# EAGLE board CAP1203-Panel (EAGLE 9.3.0)
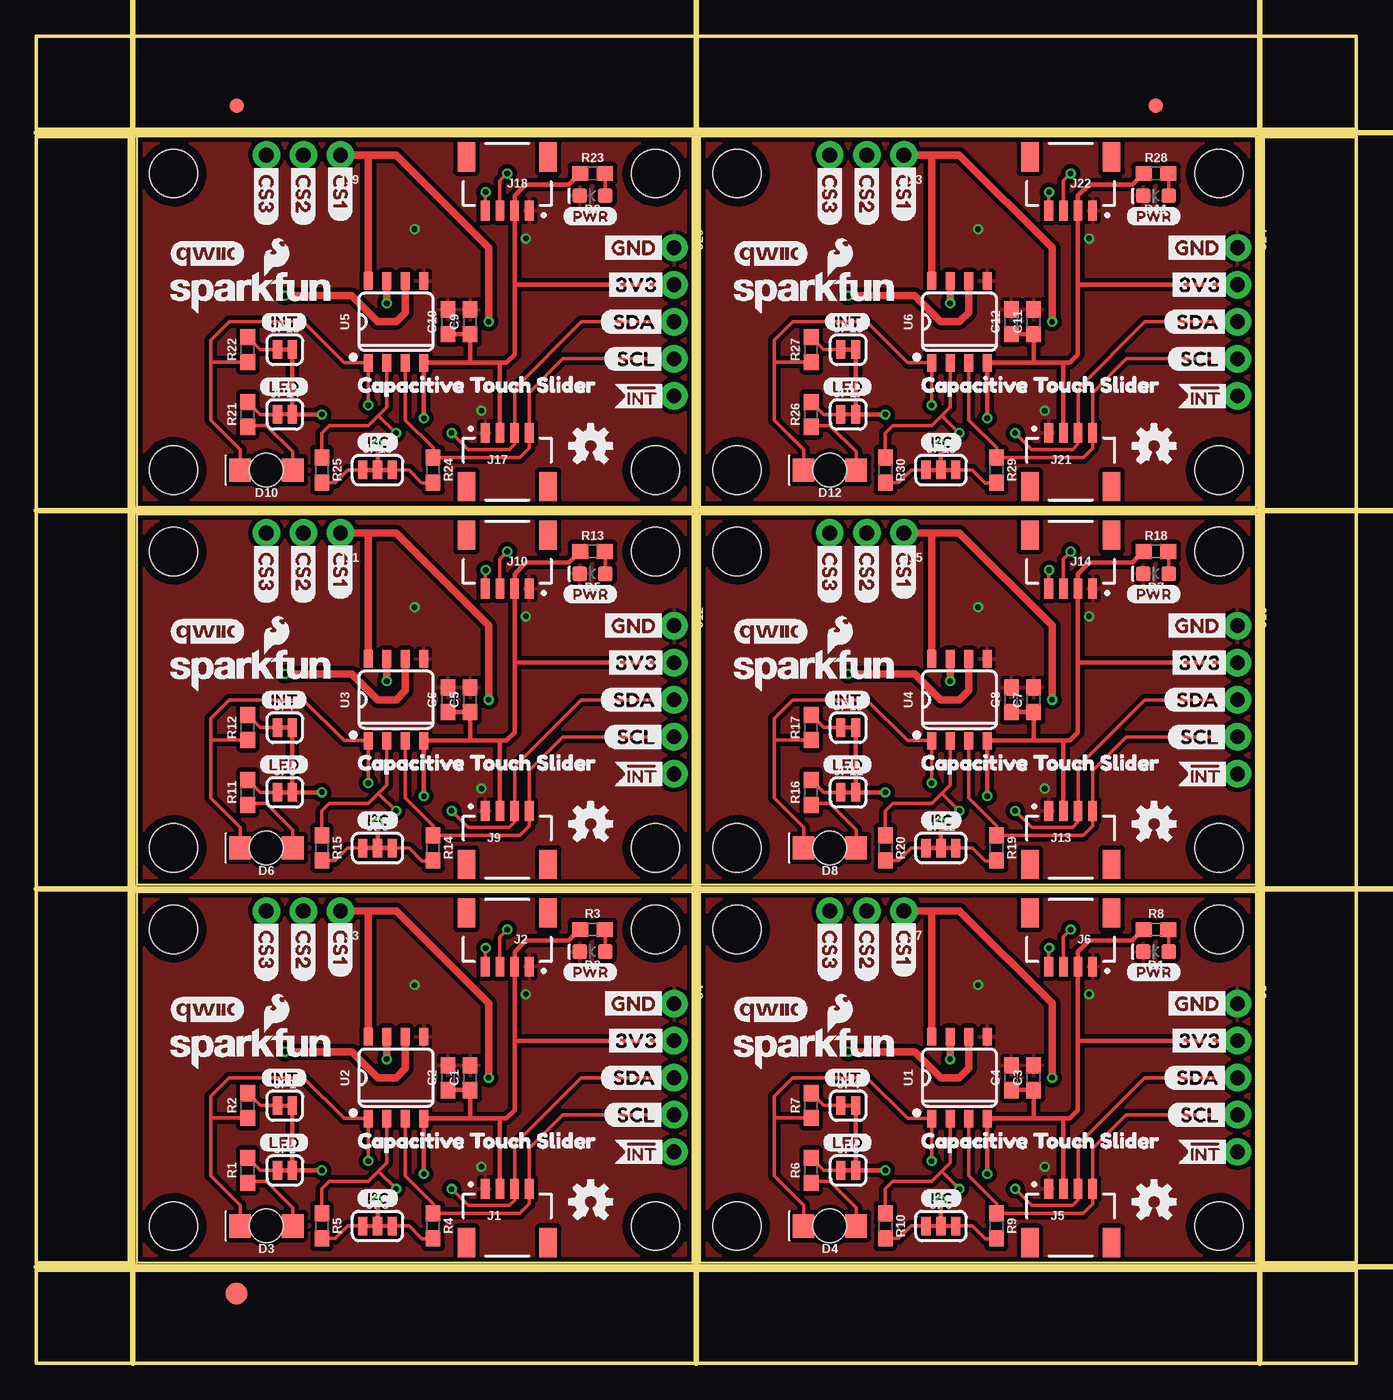
[diagram p0: board, top side]
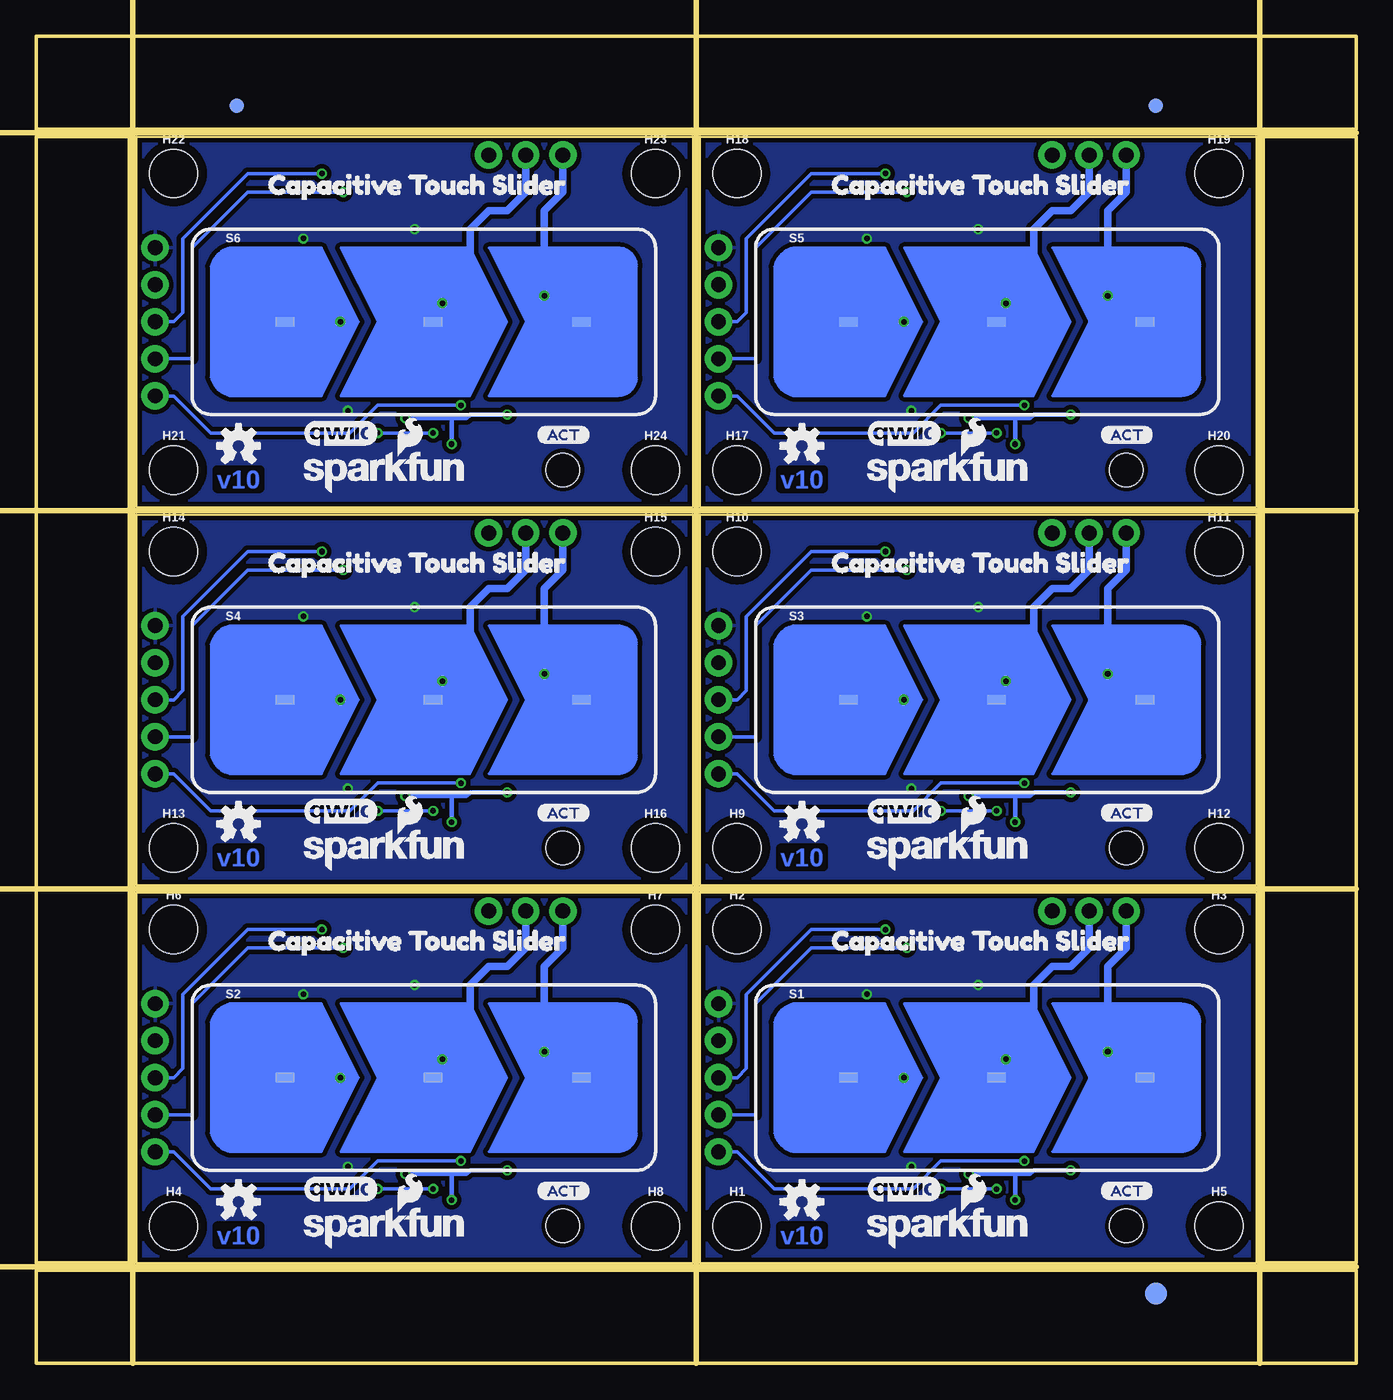
[diagram p1: board, bottom side, seen from below]

Size 90.42 x 90.93 mm. Coordinates in mm from the lower left corner, seen from the top.
Outline: 44.96,6.86 44.96,32.26 6.86,32.26 6.86,6.86 44.96,6.86
Outline: 83.57,6.86 83.57,32.26 45.47,32.26 45.47,6.86 83.57,6.86
Outline: 44.96,32.77 44.96,58.17 6.86,58.17 6.86,32.77 44.96,32.77
Outline: 83.57,32.77 83.57,58.17 45.47,58.17 45.47,32.77 83.57,32.77
Outline: 44.96,58.67 44.96,84.07 6.86,84.07 6.86,58.67 44.96,58.67
Outline: 83.57,58.67 83.57,84.07 45.47,84.07 45.47,58.67 83.57,58.67
Outline: 0,6.35 90.42,6.35 90.42,0 0,0 0,6.35
Outline: 84.07,84.07 90.42,84.07 90.42,6.86 84.07,6.86 84.07,84.07
Outline: 0,90.93 90.42,90.93 90.42,84.58 0,84.58 0,90.93
Outline: 0,84.07 6.35,84.07 6.35,6.86 0,6.86 0,84.07
Copper layers (1*16): Top 0.035mm / dielectric 1.5mm / Bottom 0.035mm
Design rules "SparkFun-2-layer-PCBWay-LIMIT": minimum track width 6mil, minimum drill 0.3mm, track to track 6mil, track to pad 6mil, pad to pad 6mil, via to via 6mil, smd to smd 6mil, copper to edge 6mil, drill to drill 6mil, minimum pad ring 6mil, minimum via ring 6mil, stop-mask expansion 4mil, vias tented up to drill 25mil, thermal gap 10mil
Net classes: 1 VCC: width 0.305 mm
Milling: 7 lines

## Footprints (pad centres in the part's own frame; a part is rotated, then mirrored left to right if it is on the bottom)
0603 = smd 1.1 x 1: 1 -0.85,0; 2 0.85,0
LED-0603 = smd 1 x 1: A -0.877,0; C 0.877,0
LED-1206-BOTTOM = smd 1.5 x 1.6: A -1.8,0; C 1.8,0 | hole 2.3: 0,0
FIDUCIAL-1X2 = smd 1 x 1: 1 0,0
FIDUCIAL-1.5X3 = smd 1.5 x 1.5: 1 0,0
STAND-OFF = hole 3.302: 0,0
JST04_1MM_RA = smd 0.6 x 1.35: 1 -1.5,0; 2 -0.5,0; 3 0.5,0; 4 1.5,0 | smd 1.2 x 2: NC1 2.8,-3.675; NC2 -2.8,-3.675
1X03_NO_SILK = drill 1.016 pad 1.88: 1 0,0; 2 2.54,0; 3 5.08,0
1X05_NO_SILK = drill 1.016 pad 1.88: 1 0,0; 2 2.54,0; 3 5.08,0; 4 7.62,0; 5 10.16,0
SMT-JUMPER_2_NC_TRACE_SILK = smd 0.635 x 1.27: 1 -0.508,0; 2 0.508,0
SMT-JUMPER_3_2-NC_TRACE_SILK = smd 0.635 x 1.27: 1 -1.016,0; 2 0,0; 3 1.016,0
CAP_SENSE_SLIDER = smd 1.27 x 0.635: 1 -10.16,0; 2 0,0; 3 10.16,0
SO08-TIGHT = smd 0.6 x 1.2: 1 -1.905,-2.8; 2 -0.635,-2.8; 3 0.635,-2.8; 4 1.905,-2.8; 5 1.905,2.8; 6 0.635,2.8; 7 -0.635,2.8; 8 -1.905,2.8

## Placement (x,y rotation side)
C1  0.1uF  [0603]  29.72,19.56 90 top
C2  1.0uF  [0603]  28.19,19.56 90 top
C3  0.1uF  [0603]  68.33,19.56 90 top
C4  1.0uF  [0603]  66.8,19.56 90 top
C5  0.1uF  [0603]  29.72,45.47 90 top
C6  1.0uF  [0603]  28.19,45.47 90 top
C7  0.1uF  [0603]  68.33,45.47 90 top
C8  1.0uF  [0603]  66.8,45.47 90 top
C9  0.1uF  [0603]  29.72,71.37 90 top
C10  1.0uF  [0603]  28.19,71.37 90 top
C11  0.1uF  [0603]  68.33,71.37 90 top
C12  1.0uF  [0603]  66.8,71.37 90 top
D1  RED  [LED-0603]  76.71,28.19 180 top
D2  RED  [LED-0603]  38.1,28.19 180 top
D3  Green  [LED-1206-BOTTOM]  15.75,9.4 180 top
D4  Green  [LED-1206-BOTTOM]  54.36,9.4 180 top
D5  RED  [LED-0603]  38.1,54.1 180 top
D6  Green  [LED-1206-BOTTOM]  15.75,35.31 180 top
D7  RED  [LED-0603]  76.71,54.1 180 top
D8  Green  [LED-1206-BOTTOM]  54.36,35.31 180 top
D9  RED  [LED-0603]  38.1,80.01 180 top
D10  Green  [LED-1206-BOTTOM]  15.75,61.21 180 top
D11  RED  [LED-0603]  76.71,80.01 180 top
D12  Green  [LED-1206-BOTTOM]  54.36,61.21 180 top
E$1  [FIDUCIAL-1X2]  13.72,86.17 0 top
E$2  [FIDUCIAL-1X2]  13.72,86.17 0 bottom
E$3  [FIDUCIAL-1X2]  76.71,86.17 0 top
E$4  [FIDUCIAL-1X2]  76.71,86.17 0 bottom
E$5  [FIDUCIAL-1.5X3]  13.72,4.76 0 top
E$6  [FIDUCIAL-1.5X3]  13.72,4.76 0 bottom
H1  STAND-OFF  [STAND-OFF]  42.42,9.4 0 bottom
H2  STAND-OFF  [STAND-OFF]  42.42,29.72 0 bottom
H3  STAND-OFF  [STAND-OFF]  9.4,29.72 0 bottom
H4  STAND-OFF  [STAND-OFF]  81.03,9.4 0 bottom
H5  STAND-OFF  [STAND-OFF]  9.4,9.4 0 bottom
H6  STAND-OFF  [STAND-OFF]  81.03,29.72 0 bottom
H7  STAND-OFF  [STAND-OFF]  48.01,29.72 0 bottom
H8  STAND-OFF  [STAND-OFF]  48.01,9.4 0 bottom
H9  STAND-OFF  [STAND-OFF]  42.42,35.31 0 bottom
H10  STAND-OFF  [STAND-OFF]  42.42,55.63 0 bottom
H11  STAND-OFF  [STAND-OFF]  9.4,55.63 0 bottom
H12  STAND-OFF  [STAND-OFF]  9.4,35.31 0 bottom
H13  STAND-OFF  [STAND-OFF]  81.03,35.31 0 bottom
H14  STAND-OFF  [STAND-OFF]  81.03,55.63 0 bottom
H15  STAND-OFF  [STAND-OFF]  48.01,55.63 0 bottom
H16  STAND-OFF  [STAND-OFF]  48.01,35.31 0 bottom
H17  STAND-OFF  [STAND-OFF]  42.42,61.21 0 bottom
H18  STAND-OFF  [STAND-OFF]  42.42,81.53 0 bottom
H19  STAND-OFF  [STAND-OFF]  9.4,81.53 0 bottom
H20  STAND-OFF  [STAND-OFF]  9.4,61.21 0 bottom
H21  STAND-OFF  [STAND-OFF]  81.03,61.21 0 bottom
H22  STAND-OFF  [STAND-OFF]  81.03,81.53 0 bottom
H23  STAND-OFF  [STAND-OFF]  48.01,81.53 0 bottom
H24  STAND-OFF  [STAND-OFF]  48.01,61.21 0 bottom
J1  Qwiic Right Angle  [JST04_1MM_RA]  32.26,11.94 0 top
J2  Qwiic Right Angle  [JST04_1MM_RA]  32.26,27.18 180 top
J3  Cap Touch Breakout Pins  [1X03_NO_SILK]  20.83,30.99 180 top
J4  I2C Breakout Pins  [1X05_NO_SILK]  43.69,24.64 270 top
J5  Qwiic Right Angle  [JST04_1MM_RA]  70.87,11.94 0 top
J6  Qwiic Right Angle  [JST04_1MM_RA]  70.87,27.18 180 top
J7  Cap Touch Breakout Pins  [1X03_NO_SILK]  59.44,30.99 180 top
J8  I2C Breakout Pins  [1X05_NO_SILK]  82.3,24.64 270 top
J9  Qwiic Right Angle  [JST04_1MM_RA]  32.26,37.85 0 top
J10  Qwiic Right Angle  [JST04_1MM_RA]  32.26,53.09 180 top
J11  Cap Touch Breakout Pins  [1X03_NO_SILK]  20.83,56.9 180 top
J12  I2C Breakout Pins  [1X05_NO_SILK]  43.69,50.55 270 top
J13  Qwiic Right Angle  [JST04_1MM_RA]  70.87,37.85 0 top
J14  Qwiic Right Angle  [JST04_1MM_RA]  70.87,53.09 180 top
J15  Cap Touch Breakout Pins  [1X03_NO_SILK]  59.44,56.9 180 top
J16  I2C Breakout Pins  [1X05_NO_SILK]  82.3,50.55 270 top
J17  Qwiic Right Angle  [JST04_1MM_RA]  32.26,63.75 0 top
J18  Qwiic Right Angle  [JST04_1MM_RA]  32.26,78.99 180 top
J19  Cap Touch Breakout Pins  [1X03_NO_SILK]  20.83,82.8 180 top
J20  I2C Breakout Pins  [1X05_NO_SILK]  43.69,76.45 270 top
J21  Qwiic Right Angle  [JST04_1MM_RA]  70.87,63.75 0 top
J22  Qwiic Right Angle  [JST04_1MM_RA]  70.87,78.99 180 top
J23  Cap Touch Breakout Pins  [1X03_NO_SILK]  59.44,82.8 180 top
J24  I2C Breakout Pins  [1X05_NO_SILK]  82.3,76.45 270 top
JP1  JUMPER-SMT_2_NC_TRACE_SILK  [SMT-JUMPER_2_NC_TRACE_SILK]  17.02,17.65 0 top
JP2  JUMPER-SMT_2_NC_TRACE_SILK  [SMT-JUMPER_2_NC_TRACE_SILK]  17.02,13.21 0 top
JP3  JUMPER-SMT_3_2-NC_TRACE_SILK  [SMT-JUMPER_3_2-NC_TRACE_SILK]  23.37,9.4 0 top
JP4  JUMPER-SMT_2_NC_TRACE_SILK  [SMT-JUMPER_2_NC_TRACE_SILK]  55.63,17.65 0 top
JP5  JUMPER-SMT_2_NC_TRACE_SILK  [SMT-JUMPER_2_NC_TRACE_SILK]  55.63,13.21 0 top
JP6  JUMPER-SMT_3_2-NC_TRACE_SILK  [SMT-JUMPER_3_2-NC_TRACE_SILK]  61.98,9.4 0 top
JP7  JUMPER-SMT_2_NC_TRACE_SILK  [SMT-JUMPER_2_NC_TRACE_SILK]  17.02,43.56 0 top
JP8  JUMPER-SMT_2_NC_TRACE_SILK  [SMT-JUMPER_2_NC_TRACE_SILK]  17.02,39.12 0 top
JP9  JUMPER-SMT_3_2-NC_TRACE_SILK  [SMT-JUMPER_3_2-NC_TRACE_SILK]  23.37,35.31 0 top
JP10  JUMPER-SMT_2_NC_TRACE_SILK  [SMT-JUMPER_2_NC_TRACE_SILK]  55.63,43.56 0 top
JP11  JUMPER-SMT_2_NC_TRACE_SILK  [SMT-JUMPER_2_NC_TRACE_SILK]  55.63,39.12 0 top
JP12  JUMPER-SMT_3_2-NC_TRACE_SILK  [SMT-JUMPER_3_2-NC_TRACE_SILK]  61.98,35.31 0 top
JP13  JUMPER-SMT_2_NC_TRACE_SILK  [SMT-JUMPER_2_NC_TRACE_SILK]  17.02,69.47 0 top
JP14  JUMPER-SMT_2_NC_TRACE_SILK  [SMT-JUMPER_2_NC_TRACE_SILK]  17.02,65.02 0 top
JP15  JUMPER-SMT_3_2-NC_TRACE_SILK  [SMT-JUMPER_3_2-NC_TRACE_SILK]  23.37,61.21 0 top
JP16  JUMPER-SMT_2_NC_TRACE_SILK  [SMT-JUMPER_2_NC_TRACE_SILK]  55.63,69.47 0 top
JP17  JUMPER-SMT_2_NC_TRACE_SILK  [SMT-JUMPER_2_NC_TRACE_SILK]  55.63,65.02 0 top
JP18  JUMPER-SMT_3_2-NC_TRACE_SILK  [SMT-JUMPER_3_2-NC_TRACE_SILK]  61.98,61.21 0 top
LOGO1  SFE_LOGO_NAME_FLAME.1_INCH  [SFE_LOGO_NAME_FLAME_.1]  14.73,21.59 0 top
LOGO2  SFE_LOGO_NAME_FLAME.1_INCH  [SFE_LOGO_NAME_FLAME_.1]  27.94,9.27 0 bottom
LOGO3  OSHW-LOGOS  [OSHW-LOGO-S]  37.97,11.05 0 bottom
LOGO4  SFE_LOGO_NAME_FLAME.1_INCH  [SFE_LOGO_NAME_FLAME_.1]  53.34,21.59 0 top
LOGO5  OSHW-LOGOS  [OSHW-LOGO-S]  37.97,11.05 0 top
LOGO6  OSHW-LOGOS  [OSHW-LOGO-S]  76.58,11.05 0 bottom
LOGO7  OSHW-LOGOS  [OSHW-LOGO-S]  76.58,11.05 0 top
LOGO8  SFE_LOGO_NAME_FLAME.1_INCH  [SFE_LOGO_NAME_FLAME_.1]  66.55,9.27 0 bottom
LOGO9  SFE_LOGO_NAME_FLAME.1_INCH  [SFE_LOGO_NAME_FLAME_.1]  14.73,47.5 0 top
LOGO10  OSHW-LOGOS  [OSHW-LOGO-S]  37.97,36.96 0 bottom
LOGO11  OSHW-LOGOS  [OSHW-LOGO-S]  37.97,36.96 0 top
LOGO12  SFE_LOGO_NAME_FLAME.1_INCH  [SFE_LOGO_NAME_FLAME_.1]  27.94,35.18 0 bottom
LOGO13  SFE_LOGO_NAME_FLAME.1_INCH  [SFE_LOGO_NAME_FLAME_.1]  53.34,47.5 0 top
LOGO14  OSHW-LOGOS  [OSHW-LOGO-S]  76.58,36.96 0 bottom
LOGO15  OSHW-LOGOS  [OSHW-LOGO-S]  76.58,36.96 0 top
LOGO16  SFE_LOGO_NAME_FLAME.1_INCH  [SFE_LOGO_NAME_FLAME_.1]  66.55,35.18 0 bottom
LOGO17  SFE_LOGO_NAME_FLAME.1_INCH  [SFE_LOGO_NAME_FLAME_.1]  14.73,73.41 0 top
LOGO18  OSHW-LOGOS  [OSHW-LOGO-S]  37.97,62.86 0 bottom
LOGO19  OSHW-LOGOS  [OSHW-LOGO-S]  37.97,62.86 0 top
LOGO20  SFE_LOGO_NAME_FLAME.1_INCH  [SFE_LOGO_NAME_FLAME_.1]  27.94,61.09 0 bottom
LOGO21  SFE_LOGO_NAME_FLAME.1_INCH  [SFE_LOGO_NAME_FLAME_.1]  53.34,73.41 0 top
LOGO22  OSHW-LOGOS  [OSHW-LOGO-S]  76.58,62.86 0 bottom
LOGO23  OSHW-LOGOS  [OSHW-LOGO-S]  76.58,62.86 0 top
LOGO24  SFE_LOGO_NAME_FLAME.1_INCH  [SFE_LOGO_NAME_FLAME_.1]  66.55,61.09 0 bottom
R1  1k  [0603]  14.48,13.21 90 top
R2  10k  [0603]  14.48,17.65 90 top
R3  1k  [0603]  38.1,29.72 0 top
R4  2.2k  [0603]  27.18,9.4 270 top
R5  2.2k  [0603]  19.56,9.4 270 top
R6  1k  [0603]  53.09,13.21 90 top
R7  10k  [0603]  53.09,17.65 90 top
R8  1k  [0603]  76.71,29.72 0 top
R9  2.2k  [0603]  65.79,9.4 270 top
R10  2.2k  [0603]  58.17,9.4 270 top
R11  1k  [0603]  14.48,39.12 90 top
R12  10k  [0603]  14.48,43.56 90 top
R13  1k  [0603]  38.1,55.63 0 top
R14  2.2k  [0603]  27.18,35.31 270 top
R15  2.2k  [0603]  19.56,35.31 270 top
R16  1k  [0603]  53.09,39.12 90 top
R17  10k  [0603]  53.09,43.56 90 top
R18  1k  [0603]  76.71,55.63 0 top
R19  2.2k  [0603]  65.79,35.31 270 top
R20  2.2k  [0603]  58.17,35.31 270 top
R21  1k  [0603]  14.48,65.02 90 top
R22  10k  [0603]  14.48,69.47 90 top
R23  1k  [0603]  38.1,81.53 0 top
R24  2.2k  [0603]  27.18,61.21 270 top
R25  2.2k  [0603]  19.56,61.21 270 top
R26  1k  [0603]  53.09,65.02 90 top
R27  10k  [0603]  53.09,69.47 90 top
R28  1k  [0603]  76.71,81.53 0 top
R29  2.2k  [0603]  65.79,61.21 270 top
R30  2.2k  [0603]  58.17,61.21 270 top
S1  [CAP_SENSE_SLIDER]  24.64,19.56 0 bottom
S2  [CAP_SENSE_SLIDER]  63.25,19.56 0 bottom
S3  [CAP_SENSE_SLIDER]  24.64,45.47 0 bottom
S4  [CAP_SENSE_SLIDER]  63.25,45.47 0 bottom
S5  [CAP_SENSE_SLIDER]  24.64,71.37 0 bottom
S6  [CAP_SENSE_SLIDER]  63.25,71.37 0 bottom
U1  CAP1203  [SO08-TIGHT]  63.25,19.56 0 top
U2  CAP1203  [SO08-TIGHT]  24.64,19.56 0 top
U3  CAP1203  [SO08-TIGHT]  24.64,45.47 0 top
U4  CAP1203  [SO08-TIGHT]  63.25,45.47 0 top
U5  CAP1203  [SO08-TIGHT]  24.64,71.37 0 top
U6  CAP1203  [SO08-TIGHT]  63.25,71.37 0 top
U$1  [3V3-04]  38.73,22.1 0 top
U$2  [GND-04]  38.48,24.64 0 top
U$3  [3V3-04]  77.34,22.1 0 top
U$4  QWIIC_LOGO_5MM  [QWIIC_5MM]  30.99,11.94 0 bottom
U$5  [GND-04]  77.09,24.64 0 top
U$6  [ACT0]  17.53,11.81 0 bottom
U$7  [#INT5]  39.37,14.48 0 top
U$8  [SCL3]  38.86,17.02 0 top
U$9  [SDA4]  38.61,19.56 0 top
U$10  [CS10]  20.83,30.61 270 top
U$11  [CS21]  18.29,30.61 270 top
U$12  [CS32]  15.75,30.61 270 top
U$13  [I_SUPER2_C-()-03]  21.97,11.3 0 top
U$14  [INT0]  15.37,19.56 0 top
U$15  [PWR-()-03]  36.07,26.8 0 top
U$16  [LED0]  15.24,15.11 0 top
U$17  QWIIC_LOGO_5MM  [QWIIC_5MM]  11.68,24.26 0 top
U$18  [CAPACITIVE_TOUCH_SLIDER0]  37.08,28.96 0 bottom
U$19  [CAPACITIVE_TOUCH_SLIDER0]  21.08,15.24 0 top
U$20  [#INT5]  77.98,14.48 0 top
U$21  [SCL3]  77.47,17.02 0 top
U$22  [SDA4]  77.22,19.56 0 top
U$23  [CS10]  59.44,30.61 270 top
U$24  [CS21]  56.9,30.61 270 top
U$25  [CS32]  54.36,30.61 270 top
U$26  [LED0]  53.85,15.11 0 top
U$27  [I_SUPER2_C-()-03]  60.58,11.3 0 top
U$28  [INT0]  53.97,19.56 0 top
U$29  [PWR-()-03]  74.68,26.8 0 top
U$30  QWIIC_LOGO_5MM  [QWIIC_5MM]  50.29,24.26 0 top
U$31  QWIIC_LOGO_5MM  [QWIIC_5MM]  69.6,11.94 0 bottom
U$32  [ACT0]  56.13,11.81 0 bottom
U$33  [CAPACITIVE_TOUCH_SLIDER0]  75.69,28.96 0 bottom
U$34  [CAPACITIVE_TOUCH_SLIDER0]  59.69,15.24 0 top
U$35  [3V3-04]  38.73,48.01 0 top
U$36  [GND-04]  38.48,50.55 0 top
U$37  [#INT5]  39.37,40.39 0 top
U$38  [SCL3]  38.86,42.93 0 top
U$39  [SDA4]  38.61,45.47 0 top
U$40  [CS10]  20.83,56.51 270 top
U$41  [CS21]  18.29,56.51 270 top
U$42  [CS32]  15.75,56.51 270 top
U$43  [LED0]  15.24,41.02 0 top
U$44  [I_SUPER2_C-()-03]  21.97,37.21 0 top
U$45  [INT0]  15.37,45.47 0 top
U$46  [PWR-()-03]  36.07,52.7 0 top
U$47  QWIIC_LOGO_5MM  [QWIIC_5MM]  11.68,50.16 0 top
U$48  QWIIC_LOGO_5MM  [QWIIC_5MM]  30.99,37.85 0 bottom
U$49  [ACT0]  17.53,37.72 0 bottom
U$50  [CAPACITIVE_TOUCH_SLIDER0]  37.08,54.86 0 bottom
U$51  [CAPACITIVE_TOUCH_SLIDER0]  21.08,41.15 0 top
U$52  [3V3-04]  77.34,48.01 0 top
U$53  [GND-04]  77.09,50.55 0 top
U$54  [#INT5]  77.98,40.39 0 top
U$55  [SCL3]  77.47,42.93 0 top
U$56  [SDA4]  77.22,45.47 0 top
U$57  [CS10]  59.44,56.51 270 top
U$58  [CS21]  56.9,56.51 270 top
U$59  [CS32]  54.36,56.51 270 top
U$60  [LED0]  53.85,41.02 0 top
U$61  [I_SUPER2_C-()-03]  60.58,37.21 0 top
U$62  [INT0]  53.97,45.47 0 top
U$63  [PWR-()-03]  74.68,52.7 0 top
U$64  QWIIC_LOGO_5MM  [QWIIC_5MM]  50.29,50.16 0 top
U$65  QWIIC_LOGO_5MM  [QWIIC_5MM]  69.6,37.85 0 bottom
U$66  [ACT0]  56.13,37.72 0 bottom
U$67  [CAPACITIVE_TOUCH_SLIDER0]  75.69,54.86 0 bottom
U$68  [CAPACITIVE_TOUCH_SLIDER0]  59.69,41.15 0 top
U$69  [3V3-04]  38.73,73.91 0 top
U$70  [GND-04]  38.48,76.45 0 top
U$71  [#INT5]  39.37,66.29 0 top
U$72  [SCL3]  38.86,68.83 0 top
U$73  [SDA4]  38.61,71.37 0 top
U$74  [CS10]  20.83,82.42 270 top
U$75  [CS21]  18.29,82.42 270 top
U$76  [CS32]  15.75,82.42 270 top
U$77  [LED0]  15.24,66.93 0 top
U$78  [I_SUPER2_C-()-03]  21.97,63.12 0 top
U$79  [INT0]  15.37,71.37 0 top
U$80  [PWR-()-03]  36.07,78.61 0 top
U$81  QWIIC_LOGO_5MM  [QWIIC_5MM]  11.68,76.07 0 top
U$82  QWIIC_LOGO_5MM  [QWIIC_5MM]  30.99,63.75 0 bottom
U$83  [ACT0]  17.53,63.63 0 bottom
U$84  [CAPACITIVE_TOUCH_SLIDER0]  37.08,80.77 0 bottom
U$85  [CAPACITIVE_TOUCH_SLIDER0]  21.08,67.06 0 top
U$86  [3V3-04]  77.34,73.91 0 top
U$87  [GND-04]  77.09,76.45 0 top
U$88  [#INT5]  77.98,66.29 0 top
U$89  [SCL3]  77.47,68.83 0 top
U$90  [SDA4]  77.22,71.37 0 top
U$91  [CS10]  59.44,82.42 270 top
U$92  [CS21]  56.9,82.42 270 top
U$93  [CS32]  54.36,82.42 270 top
U$94  [LED0]  53.85,66.93 0 top
U$95  [I_SUPER2_C-()-03]  60.58,63.12 0 top
U$96  [INT0]  53.97,71.37 0 top
U$97  [PWR-()-03]  74.68,78.61 0 top
U$98  QWIIC_LOGO_5MM  [QWIIC_5MM]  50.29,76.07 0 top
U$99  QWIIC_LOGO_5MM  [QWIIC_5MM]  69.6,63.75 0 bottom
U$100  [ACT0]  56.13,63.63 0 bottom
U$101  [CAPACITIVE_TOUCH_SLIDER0]  75.69,80.77 0 bottom
U$102  [CAPACITIVE_TOUCH_SLIDER0]  59.69,67.06 0 top

## Library data of the parts
C1 C3 C5 C7 C9 C11 = SparkFun-Capacitors; PROD_ID: CAP-08604
C2 C4 C6 C8 C10 C12 = SparkFun-Capacitors; PROD_ID: CAP-00868
D1 D2 D5 D7 D9 D11 = SparkFun-LED; PROD_ID: DIO-00819
D3 D4 D6 D8 D10 D12 = SparkFun-LED; PROD_ID: DIO-11076
E$1-E$4 LOGO1-LOGO24 U$4 U$17 U$30 U$31 U$47 U$48 U$64 U$65 U$81 U$82 U$98 U$99 = SparkFun-Aesthetics
E$5 E$6 = SparkFun-Retired
H1-H24 = SparkFun-Hardware
J1 J2 J5 J6 J9 J10 J13 J14 J17 J18 J21 J22 = SparkFun-Connectors; PROD_ID: CONN-13694
J3 J4 J7 J8 J11 J12 J15 J16 J19 J20 J23 J24 = SparkFun-Connectors
JP1-JP18 = SparkFun-Jumpers
R1 R3 R6 R8 R11 R13 R16 R18 R21 R23 R26 R28 = SparkFun-Resistors; PROD_ID: RES-07856
R2 R7 R12 R17 R22 R27 = SparkFun-Resistors; PROD_ID: RES-00824
R4 R5 R9 R10 R14 R15 R19 R20 R24 R25 R29 R30 = SparkFun-Resistors; PROD_ID: RES-08272
S1-S6 = SparkX
U1-U6 = SparkFun-Sensors; PROD_ID: IC-14356
U$1-U$3 U$5 U$13 U$15 U$27 U$29 U$35 U$36 U$44 U$46 U$52 U$53 U$61 U$63 U$69 U$70 U$78 U$80 U$86 U$87 U$95 U$97 = Labels
U$6 U$32 U$49 U$66 U$83 U$100 = buzzard_labels (5)
U$7-U$12 U$20-U$25 U$37-U$42 U$54-U$59 U$71-U$76 U$88-U$93 = buzzard_labels-CAP1203
U$14 U$28 U$45 U$62 U$79 U$96 = buzzard_labels (4)
U$16 U$26 U$43 U$60 U$77 U$94 = buzzard_labels (1)
U$18 U$33 U$50 U$67 U$84 U$101 = buzzard_labels (10)
U$19 U$34 U$51 U$68 U$85 U$102 = buzzard_labels (12)

## Nets
3.3V [VCC]: C1.1 C2.1 J1.2 J2.2 J4.2 JP1.2 JP2.2 JP3.2 R3.1 U2.4
3.3V1 [VCC]: C3.1 C4.1 J5.2 J6.2 J8.2 JP4.2 JP5.2 JP6.2 R8.1 U1.4
3.3V2 [VCC]: C5.1 C6.1 J9.2 J10.2 J12.2 JP7.2 JP8.2 JP9.2 R13.1 U3.4
3.3V3 [VCC]: C7.1 C8.1 J13.2 J14.2 J16.2 JP10.2 JP11.2 JP12.2 R18.1 U4.4
3.3V4 [VCC]: C9.1 C10.1 J17.2 J18.2 J20.2 JP13.2 JP14.2 JP15.2 R23.1 U5.4
3.3V5 [VCC]: C11.1 C12.1 J21.2 J22.2 J24.2 JP16.2 JP17.2 JP18.2 R28.1 U6.4
!INT: D3.C J4.5 R2.1 U2.1
!INT1: D4.C J8.5 R7.1 U1.1
!INT2: D6.C J12.5 R12.1 U3.1
!INT3: D8.C J16.5 R17.1 U4.1
!INT4: D10.C J20.5 R22.1 U5.1
!INT5: D12.C J24.5 R27.1 U6.1
CS1: J3.1 S1.1 U2.8
CS2: J3.2 S1.2 U2.7
CS3: J3.3 S1.3 U2.6
CS4: J7.1 S2.1 U1.8
CS5: J7.2 S2.2 U1.7
CS6: J7.3 S2.3 U1.6
CS7: J11.1 S3.1 U3.8
CS8: J11.2 S3.2 U3.7
CS9: J11.3 S3.3 U3.6
CS10: J15.1 S4.1 U4.8
CS11: J15.2 S4.2 U4.7
CS12: J15.3 S4.3 U4.6
CS13: J19.1 S5.1 U5.8
CS14: J19.2 S5.2 U5.7
CS15: J19.3 S5.3 U5.6
CS16: J23.1 S6.1 U6.8
CS17: J23.2 S6.2 U6.7
CS18: J23.3 S6.3 U6.6
GND: C1.2 C2.2 D2.C J1.1 J2.1 J4.1 U2.5
GND1: C3.2 C4.2 D1.C J5.1 J6.1 J8.1 U1.5
GND2: C5.2 C6.2 D5.C J9.1 J10.1 J12.1 U3.5
GND3: C7.2 C8.2 D7.C J13.1 J14.1 J16.1 U4.5
GND4: C9.2 C10.2 D9.C J17.1 J18.1 J20.1 U5.5
GND5: C11.2 C12.2 D11.C J21.1 J22.1 J24.1 U6.5
N$1: JP1.1 R2.2
N$2: D2.A R3.2
N$3: JP2.1 R1.2
N$4: JP3.3 R4.2
N$5: JP3.1 R5.2
N$6: D3.A R1.1
N$7: JP4.1 R7.2
N$8: JP5.1 R6.2
N$9: D4.A R6.1
N$10: D1.A R8.2
N$11: JP6.3 R9.2
N$12: JP6.1 R10.2
N$13: JP7.1 R12.2
N$14: JP8.1 R11.2
N$15: D6.A R11.1
N$16: D5.A R13.2
N$17: JP9.3 R14.2
N$18: JP9.1 R15.2
N$19: JP10.1 R17.2
N$20: JP11.1 R16.2
N$21: D8.A R16.1
N$22: D7.A R18.2
N$23: JP12.3 R19.2
N$24: JP12.1 R20.2
N$25: JP13.1 R22.2
N$26: JP14.1 R21.2
N$27: D10.A R21.1
N$28: D9.A R23.2
N$29: JP15.3 R24.2
N$30: JP15.1 R25.2
N$31: JP16.1 R27.2
N$32: JP17.1 R26.2
N$33: D12.A R26.1
N$34: D11.A R28.2
N$35: JP18.3 R29.2
N$36: JP18.1 R30.2
SCL: J1.4 J2.4 J4.4 R4.1 U2.3
SCL1: J5.4 J6.4 J8.4 R9.1 U1.3
SCL2: J9.4 J10.4 J12.4 R14.1 U3.3
SCL3: J13.4 J14.4 J16.4 R19.1 U4.3
SCL4: J17.4 J18.4 J20.4 R24.1 U5.3
SCL5: J21.4 J22.4 J24.4 R29.1 U6.3
SDA: J1.3 J2.3 J4.3 R5.1 U2.2
SDA1: J5.3 J6.3 J8.3 R10.1 U1.2
SDA2: J9.3 J10.3 J12.3 R15.1 U3.2
SDA3: J13.3 J14.3 J16.3 R20.1 U4.2
SDA4: J17.3 J18.3 J20.3 R25.1 U5.2
SDA5: J21.3 J22.3 J24.3 R30.1 U6.2

## Tracks (layer width: path | path; a pad name or v marks a point on that pad's centre or on a via)
3.3V  (via drill 0.38)
  Top 0.305: JP1.2 JP2.2 v19.56,13.21 | v23.37,11.18 JP3.2 | v26.54,12.95 U2.4 29.71,16.76 | 32.76,22.1 J2.2 32.76,28.19 33.53,28.96 36.49,28.96 R3.1 | 32.76,22.1 32.76,17.32 32.2,16.76 31.75,16.76 | C2.1 C1.1 29.71,16.76 | 29.71,16.76 31.75,16.76 | 31.75,16.76 31.76,16.75 J1.2 | J4.2 32.76,22.1
  Bottom 0.305: v19.56,13.21 22.1,13.21 22.35,12.95 23.37,12.95 | v26.54,12.95 23.37,12.95 | 23.37,12.95 v23.37,11.18
3.3V1  (via drill 0.38)
  Top 0.305: JP4.2 JP5.2 v58.17,13.21 | v61.98,11.18 JP6.2 | v65.15,12.95 U1.4 68.32,16.76 | 71.37,22.1 J6.2 71.37,28.19 72.14,28.96 75.1,28.96 R8.1 | 71.37,22.1 71.37,17.32 70.81,16.76 70.36,16.76 | C4.1 C3.1 68.32,16.76 | 68.32,16.76 70.36,16.76 | 70.36,16.76 70.37,16.75 J5.2 | J8.2 71.37,22.1
  Bottom 0.305: v58.17,13.21 60.71,13.21 60.96,12.95 61.98,12.95 | v65.15,12.95 61.98,12.95 | 61.98,12.95 v61.98,11.18
3.3V2  (via drill 0.38)
  Top 0.305: JP7.2 JP8.2 v19.56,39.12 | v23.37,37.08 JP9.2 | v26.54,38.86 U3.4 29.71,42.67 | 32.76,48.01 J10.2 32.76,54.09 33.53,54.86 36.49,54.86 R13.1 | 32.76,48.01 32.76,43.23 32.2,42.67 31.75,42.67 | C6.1 C5.1 29.71,42.67 | 29.71,42.67 31.75,42.67 | 31.75,42.67 31.76,42.66 J9.2 | J12.2 32.76,48.01
  Bottom 0.305: v19.56,39.12 22.1,39.12 22.35,38.86 23.37,38.86 | v26.54,38.86 23.37,38.86 | 23.37,38.86 v23.37,37.08
3.3V3  (via drill 0.38)
  Top 0.305: JP10.2 JP11.2 v58.17,39.12 | v61.98,37.08 JP12.2 | v65.15,38.86 U4.4 68.32,42.67 | 71.37,48.01 J14.2 71.37,54.09 72.14,54.86 75.1,54.86 R18.1 | 71.37,48.01 71.37,43.23 70.81,42.67 70.36,42.67 | C8.1 C7.1 68.32,42.67 | 68.32,42.67 70.36,42.67 | 70.36,42.67 70.37,42.66 J13.2 | J16.2 71.37,48.01
  Bottom 0.305: v58.17,39.12 60.71,39.12 60.96,38.86 61.98,38.86 | v65.15,38.86 61.98,38.86 | 61.98,38.86 v61.98,37.08
3.3V4  (via drill 0.38)
  Top 0.305: JP13.2 JP14.2 v19.56,65.02 | v23.37,62.99 JP15.2 | v26.54,64.77 U5.4 29.71,68.57 | 32.76,73.91 J18.2 32.76,80 33.53,80.77 36.49,80.77 R23.1 | 32.76,73.91 32.76,69.13 32.2,68.57 31.75,68.57 | C10.1 C9.1 29.71,68.57 | 29.71,68.57 31.75,68.57 | 31.75,68.57 31.76,68.57 J17.2 | J20.2 32.76,73.91
  Bottom 0.305: v19.56,65.02 22.1,65.02 22.35,64.77 23.37,64.77 | v26.54,64.77 23.37,64.77 | 23.37,64.77 v23.37,62.99
3.3V5  (via drill 0.38)
  Top 0.305: JP16.2 JP17.2 v58.17,65.02 | v61.98,62.99 JP18.2 | v65.15,64.77 U6.4 68.32,68.57 | 71.37,73.91 J22.2 71.37,80 72.14,80.77 75.1,80.77 R28.1 | 71.37,73.91 71.37,69.13 70.81,68.57 70.36,68.57 | C12.1 C11.1 68.32,68.57 | 68.32,68.57 70.36,68.57 | 70.36,68.57 70.37,68.57 J21.2 | J24.2 71.37,73.91
  Bottom 0.305: v58.17,65.02 60.71,65.02 60.96,64.77 61.98,64.77 | v65.15,64.77 61.98,64.77 | 61.98,64.77 v61.98,62.99
!INT  (via drill 0.38)
  Top 0.254: v22.73,13.84 U2.1 21.09,16.76 18.29,19.56 13.21,19.56 11.94,18.29 11.94,16.8 | D3.C 13.97,9.42 13.97,10.79 11.94,12.83 11.94,16.8 | R2.1 11.94,16.8
  Bottom 0.254: J4.5 42.42,14.48 39.88,11.94 30.35,11.94 28.45,13.84 v22.73,13.84
!INT1  (via drill 0.38)
  Top 0.254: v61.34,13.84 U1.1 59.7,16.76 56.9,19.56 51.82,19.56 50.55,18.29 50.55,16.8 | D4.C 52.58,9.42 52.58,10.79 50.55,12.83 50.55,16.8 | R7.1 50.55,16.8
  Bottom 0.254: J8.5 81.03,14.48 78.49,11.94 68.96,11.94 67.06,13.84 v61.34,13.84
!INT2  (via drill 0.38)
  Top 0.254: v22.73,39.75 U3.1 21.09,42.67 18.29,45.47 13.21,45.47 11.94,44.2 11.94,42.71 | D6.C 13.97,35.33 13.97,36.7 11.94,38.73 11.94,42.71 | R12.1 11.94,42.71
  Bottom 0.254: J12.5 42.42,40.39 39.88,37.85 30.35,37.85 28.45,39.75 v22.73,39.75
!INT3  (via drill 0.38)
  Top 0.254: v61.34,39.75 U4.1 59.7,42.67 56.9,45.47 51.82,45.47 50.55,44.2 50.55,42.71 | D8.C 52.58,35.33 52.58,36.7 50.55,38.73 50.55,42.71 | R17.1 50.55,42.71
  Bottom 0.254: J16.5 81.03,40.39 78.49,37.85 68.96,37.85 67.06,39.75 v61.34,39.75
!INT4  (via drill 0.38)
  Top 0.254: v22.73,65.66 U5.1 21.09,68.57 18.29,71.37 13.21,71.37 11.94,70.1 11.94,68.62 | D10.C 13.97,61.24 13.97,62.61 11.94,64.64 11.94,68.62 | R22.1 11.94,68.62
  Bottom 0.254: J20.5 42.42,66.29 39.88,63.75 30.35,63.75 28.45,65.66 v22.73,65.66
!INT5  (via drill 0.38)
  Top 0.254: v61.34,65.66 U6.1 59.7,68.57 56.9,71.37 51.82,71.37 50.55,70.1 50.55,68.62 | D12.C 52.58,61.24 52.58,62.61 50.55,64.64 50.55,68.62 | R27.1 50.55,68.62
  Bottom 0.254: J24.5 81.03,66.29 78.49,63.75 68.96,63.75 67.06,65.66 v61.34,65.66
CS1  (via drill 0.38)
  Top 0.508: v30.99,19.56 30.99,24.64 24.64,30.99 22.73,30.99 | U2.8 22.73,30.99 | 22.73,30.99 J3.1
  Bottom 0.508: S1.1 v30.99,19.56
CS2  (via drill 0.38)
  Top 0.508: U2.7 v24,20.83
  Bottom 0.254: 24,20.95 v24,20.83
  Bottom 0.508: S1.2 24,20.19 v24,20.83 22.1,22.73 22.1,25.91 20.83,27.18 19.56,27.18 18.29,28.45 J3.2
CS3  (via drill 0.38)
  Top 0.508: v17.02,21.34 21.59,21.34 23.37,19.56 24.64,19.56 25.27,20.19 U2.6
  Bottom 0.508: S1.3 16.26,21.34 v17.02,21.34 17.02,27.18 15.75,28.45 J3.3
CS4  (via drill 0.38)
  Top 0.508: v69.6,19.56 69.6,24.64 63.25,30.99 61.34,30.99 | U1.8 61.34,30.99 | 61.34,30.99 J7.1
  Bottom 0.508: S2.1 v69.6,19.56
CS5  (via drill 0.38)
  Top 0.508: U1.7 v62.61,20.83
  Bottom 0.254: 62.61,20.95 v62.61,20.83
  Bottom 0.508: S2.2 62.61,20.19 v62.61,20.83 60.71,22.73 60.71,25.91 59.44,27.18 58.17,27.18 56.9,28.45 J7.2
CS6  (via drill 0.38)
  Top 0.508: v55.63,21.34 60.2,21.34 61.98,19.56 63.25,19.56 63.88,20.19 U1.6
  Bottom 0.508: S2.3 54.86,21.34 v55.63,21.34 55.63,27.18 54.36,28.45 J7.3
CS7  (via drill 0.38)
  Top 0.508: v30.99,45.47 30.99,50.55 24.64,56.9 22.73,56.9 | U3.8 22.73,56.9 | 22.73,56.9 J11.1
  Bottom 0.508: S3.1 v30.99,45.47
CS8  (via drill 0.38)
  Top 0.508: U3.7 v24,46.74
  Bottom 0.254: 24,46.86 v24,46.74
  Bottom 0.508: S3.2 24,46.1 v24,46.74 22.1,48.64 22.1,51.82 20.83,53.09 19.56,53.09 18.29,54.36 J11.2
CS9  (via drill 0.38)
  Top 0.508: v17.02,47.24 21.59,47.24 23.37,45.47 24.64,45.47 25.27,46.1 U3.6
  Bottom 0.508: S3.3 16.26,47.24 v17.02,47.24 17.02,53.09 15.75,54.36 J11.3
CS10  (via drill 0.38)
  Top 0.508: v69.6,45.47 69.6,50.55 63.25,56.9 61.34,56.9 | U4.8 61.34,56.9 | 61.34,56.9 J15.1
  Bottom 0.508: S4.1 v69.6,45.47
CS11  (via drill 0.38)
  Top 0.508: U4.7 v62.61,46.74
  Bottom 0.254: 62.61,46.86 v62.61,46.74
  Bottom 0.508: S4.2 62.61,46.1 v62.61,46.74 60.71,48.64 60.71,51.82 59.44,53.09 58.17,53.09 56.9,54.36 J15.2
CS12  (via drill 0.38)
  Top 0.508: v55.63,47.24 60.2,47.24 61.98,45.47 63.25,45.47 63.88,46.1 U4.6
  Bottom 0.508: S4.3 54.86,47.24 v55.63,47.24 55.63,53.09 54.36,54.36 J15.3
CS13  (via drill 0.38)
  Top 0.508: v30.99,71.37 30.99,76.45 24.64,82.8 22.73,82.8 | U5.8 22.73,82.8 | 22.73,82.8 J19.1
  Bottom 0.508: S5.1 v30.99,71.37
CS14  (via drill 0.38)
  Top 0.508: U5.7 v24,72.64
  Bottom 0.254: 24,72.77 v24,72.64
  Bottom 0.508: S5.2 24,72.01 v24,72.64 22.1,74.55 22.1,77.72 20.83,78.99 19.56,78.99 18.29,80.26 J19.2
CS15  (via drill 0.38)
  Top 0.508: v17.02,73.15 21.59,73.15 23.37,71.37 24.64,71.37 25.27,72.01 U5.6
  Bottom 0.508: S5.3 16.26,73.15 v17.02,73.15 17.02,78.99 15.75,80.26 J19.3
CS16  (via drill 0.38)
  Top 0.508: v69.6,71.37 69.6,76.45 63.25,82.8 61.34,82.8 | U6.8 61.34,82.8 | 61.34,82.8 J23.1
  Bottom 0.508: S6.1 v69.6,71.37
CS17  (via drill 0.38)
  Top 0.508: U6.7 v62.61,72.64
  Bottom 0.254: 62.61,72.77 v62.61,72.64
  Bottom 0.508: S6.2 62.61,72.01 v62.61,72.64 60.71,74.55 60.71,77.72 59.44,78.99 58.17,78.99 56.9,80.26 J23.2
CS18  (via drill 0.38)
  Top 0.508: v55.63,73.15 60.2,73.15 61.98,71.37 63.25,71.37 63.88,72.01 U6.6
  Bottom 0.508: S6.3 54.86,73.15 v55.63,73.15 55.63,78.99 54.36,80.26 J23.3
GND  (via drill 0.38)
  other vias: 33.53,25.27 25.91,25.91 30.48,13.46
  pour Top (isolate 0.305): 44.96,32.26 44.96,6.86 6.86,6.86 6.86,32.26
  pour Bottom (isolate 0.305): 44.96,32.26 44.96,6.86 6.86,6.86 6.86,32.26
GND1  (via drill 0.38)
  other vias: 72.14,25.27 64.52,25.91 69.09,13.46
  pour Top (isolate 0.305): 83.57,32.26 83.57,6.86 45.47,6.86 45.47,32.26
  pour Bottom (isolate 0.305): 83.57,32.26 83.57,6.86 45.47,6.86 45.47,32.26
GND2  (via drill 0.38)
  other vias: 33.53,51.18 25.91,51.82 30.48,39.37
  pour Top (isolate 0.305): 44.96,58.17 44.96,32.77 6.86,32.77 6.86,58.17
  pour Bottom (isolate 0.305): 44.96,58.17 44.96,32.77 6.86,32.77 6.86,58.17
GND3  (via drill 0.38)
  other vias: 72.14,51.18 64.52,51.82 69.09,39.37
  pour Top (isolate 0.305): 83.57,58.17 83.57,32.77 45.47,32.77 45.47,58.17
  pour Bottom (isolate 0.305): 83.57,58.17 83.57,32.77 45.47,32.77 45.47,58.17
GND4  (via drill 0.38)
  other vias: 33.53,77.09 25.91,77.72 30.48,65.28
  pour Top (isolate 0.305): 44.96,84.07 44.96,58.67 6.86,58.67 6.86,84.07
  pour Bottom (isolate 0.305): 44.96,84.07 44.96,58.67 6.86,58.67 6.86,84.07
GND5  (via drill 0.38)
  other vias: 72.14,77.09 64.52,77.72 69.09,65.28
  pour Top (isolate 0.305): 83.57,84.07 83.57,58.67 45.47,58.67 45.47,84.07
  pour Bottom (isolate 0.305): 83.57,84.07 83.57,58.67 45.47,58.67 45.47,84.07
N$1
  Top 0.254: R2.2 15.33,17.65 JP1.1
N$2
  Top 0.254: R3.2 38.98,29.69 D2.A
N$3
  Top 0.254: JP2.1 15.33,13.21 R1.2
N$4
  Top 0.254: JP3.3 25.53,9.4 26.42,8.51 27.14,8.51 R4.2
N$5
  Top 0.254: JP3.1 21.34,9.4 20.49,8.55 R5.2
N$6
  Top 0.254: D3.A 17.55,10.65 15.75,12.45 14.57,12.45 R1.1
N$7
  Top 0.254: R7.2 53.94,17.65 JP4.1
N$8
  Top 0.254: JP5.1 53.94,13.21 R6.2
N$9
  Top 0.254: D4.A 56.16,10.65 54.36,12.45 53.17,12.45 R6.1
N$10
  Top 0.254: R8.2 77.59,29.69 D1.A
N$11
  Top 0.254: JP6.3 64.14,9.4 65.02,8.51 65.75,8.51 R9.2
N$12
  Top 0.254: JP6.1 59.94,9.4 59.09,8.55 R10.2
N$13
  Top 0.254: R12.2 15.33,43.56 JP7.1
N$14
  Top 0.254: JP8.1 15.33,39.12 R11.2
N$15
  Top 0.254: D6.A 17.55,36.55 15.75,38.35 14.57,38.35 R11.1
N$16
  Top 0.254: R13.2 38.98,55.6 D5.A
N$17
  Top 0.254: JP9.3 25.53,35.31 26.42,34.42 27.14,34.42 R14.2
N$18
  Top 0.254: JP9.1 21.34,35.31 20.49,34.46 R15.2
N$19
  Top 0.254: R17.2 53.94,43.56 JP10.1
N$20
  Top 0.254: JP11.1 53.94,39.12 R16.2
N$21
  Top 0.254: D8.A 56.16,36.55 54.36,38.35 53.17,38.35 R16.1
N$22
  Top 0.254: R18.2 77.59,55.6 D7.A
N$23
  Top 0.254: JP12.3 64.14,35.31 65.02,34.42 65.75,34.42 R19.2
N$24
  Top 0.254: JP12.1 59.94,35.31 59.09,34.46 R20.2
N$25
  Top 0.254: R22.2 15.33,69.47 JP13.1
N$26
  Top 0.254: JP14.1 15.33,65.02 R21.2
N$27
  Top 0.254: D10.A 17.55,62.46 15.75,64.26 14.57,64.26 R21.1
N$28
  Top 0.254: R23.2 38.98,81.51 D9.A
N$29
  Top 0.254: JP15.3 25.53,61.21 26.42,60.32 27.14,60.32 R24.2
N$30
  Top 0.254: JP15.1 21.34,61.21 20.49,60.36 R25.2
N$31
  Top 0.254: R27.2 53.94,69.47 JP16.1
N$32
  Top 0.254: JP17.1 53.94,65.02 R26.2
N$33
  Top 0.254: D12.A 56.16,62.46 54.36,64.26 53.17,64.26 R26.1
N$34
  Top 0.254: R28.2 77.59,81.51 D11.A
N$35
  Top 0.254: JP18.3 64.14,61.21 65.02,60.32 65.75,60.32 R29.2
N$36
  Top 0.254: JP18.1 59.94,61.21 59.09,60.36 R30.2
SCL  (via drill 0.38)
  Top 0.254: J4.4 36.07,17.02 33.76,14.71 J1.4 33.76,10.9 33.11,10.25 R4.1 27.18,10.92 25.27,12.83 U2.3 | v30.79,28.45 30.76,28.42 J2.4
  Bottom 0.254: J4.4 41.15,17.02 41.15,24.64 37.34,28.45 v30.79,28.45
SCL1  (via drill 0.38)
  Top 0.254: J8.4 74.68,17.02 72.37,14.71 J5.4 72.37,10.9 71.72,10.25 R9.1 65.79,10.92 63.88,12.83 U1.3 | v69.39,28.45 69.37,28.42 J6.4
  Bottom 0.254: J8.4 79.76,17.02 79.76,24.64 75.95,28.45 v69.39,28.45
SCL2  (via drill 0.38)
  Top 0.254: J12.4 36.07,42.93 33.76,40.62 J9.4 33.76,36.81 33.11,36.16 R14.1 27.18,36.83 25.27,38.73 U3.3 | v30.79,54.36 30.76,54.33 J10.4
  Bottom 0.254: J12.4 41.15,42.93 41.15,50.55 37.34,54.36 v30.79,54.36
SCL3  (via drill 0.38)
  Top 0.254: J16.4 74.68,42.93 72.37,40.62 J13.4 72.37,36.81 71.72,36.16 R19.1 65.79,36.83 63.88,38.73 U4.3 | v69.39,54.36 69.37,54.33 J14.4
  Bottom 0.254: J16.4 79.76,42.93 79.76,50.55 75.95,54.36 v69.39,54.36
SCL4  (via drill 0.38)
  Top 0.254: J20.4 36.07,68.83 33.76,66.52 J17.4 33.76,62.71 33.11,62.06 R24.1 27.18,62.74 25.27,64.64 U5.3 | v30.79,80.26 30.76,80.24 J18.4
  Bottom 0.254: J20.4 41.15,68.83 41.15,76.45 37.34,80.26 v30.79,80.26
SCL5  (via drill 0.38)
  Top 0.254: J24.4 74.68,68.83 72.37,66.52 J21.4 72.37,62.71 71.72,62.06 R29.1 65.79,62.74 63.88,64.64 U6.3 | v69.39,80.26 69.37,80.24 J22.4
  Bottom 0.254: J24.4 79.76,68.83 79.76,76.45 75.95,80.26 v69.39,80.26
SDA  (via drill 0.38)
  Top 0.254: J2.3 31.76,29.22 v32.26,29.72 | 23.43,13.14 22.73,12.45 20.07,12.45 19.56,11.94 R5.1 | 23.43,13.14 24,13.72 U2.2 | v24.64,11.94 23.43,13.14 | v28.45,11.94 29.59,10.79 32.38,10.79 32.76,11.17 J1.3 32.77,14.99 37.34,19.56 J4.3
  Bottom 0.254: v32.26,29.72 37.34,29.72 41.78,25.27 41.78,20.19 42.42,19.56 J4.3 | v28.45,11.94 v24.64,11.94
SDA1  (via drill 0.38)
  Top 0.254: J6.3 70.37,29.22 v70.87,29.72 | 62.04,13.14 61.34,12.45 58.67,12.45 58.17,11.94 R10.1 | 62.04,13.14 62.61,13.72 U1.2 | v63.25,11.94 62.04,13.14 | v67.06,11.94 68.2,10.79 70.99,10.79 71.37,11.17 J5.3 71.37,14.99 75.95,19.56 J8.3
  Bottom 0.254: v70.87,29.72 75.95,29.72 80.39,25.27 80.39,20.19 81.03,19.56 J8.3 | v67.06,11.94 v63.25,11.94
SDA2  (via drill 0.38)
  Top 0.254: J10.3 31.76,55.13 v32.26,55.63 | 23.43,39.05 22.73,38.35 20.07,38.35 19.56,37.85 R15.1 | 23.43,39.05 24,39.62 U3.2 | v24.64,37.85 23.43,39.05 | v28.45,37.85 29.59,36.7 32.38,36.7 32.76,37.08 J9.3 32.77,40.89 37.34,45.47 J12.3
  Bottom 0.254: v32.26,55.63 37.34,55.63 41.78,51.18 41.78,46.1 42.42,45.47 J12.3 | v28.45,37.85 v24.64,37.85
SDA3  (via drill 0.38)
  Top 0.254: J14.3 70.37,55.13 v70.87,55.63 | 62.04,39.05 61.34,38.35 58.67,38.35 58.17,37.85 R20.1 | 62.04,39.05 62.61,39.62 U4.2 | v63.25,37.85 62.04,39.05 | v67.06,37.85 68.2,36.7 70.99,36.7 71.37,37.08 J13.3 71.37,40.89 75.95,45.47 J16.3
  Bottom 0.254: v70.87,55.63 75.95,55.63 80.39,51.18 80.39,46.1 81.03,45.47 J16.3 | v67.06,37.85 v63.25,37.85
SDA4  (via drill 0.38)
  Top 0.254: J18.3 31.76,81.03 v32.26,81.53 | 23.43,64.96 22.73,64.26 20.07,64.26 19.56,63.75 R25.1 | 23.43,64.96 24,65.53 U5.2 | v24.64,63.75 23.43,64.96 | v28.45,63.75 29.59,62.61 32.38,62.61 32.76,62.98 J17.3 32.77,66.8 37.34,71.37 J20.3
  Bottom 0.254: v32.26,81.53 37.34,81.53 41.78,77.09 41.78,72.01 42.42,71.37 J20.3 | v28.45,63.75 v24.64,63.75
SDA5  (via drill 0.38)
  Top 0.254: J22.3 70.37,81.03 v70.87,81.53 | 62.04,64.96 61.34,64.26 58.67,64.26 58.17,63.75 R30.1 | 62.04,64.96 62.61,65.53 U6.2 | v63.25,63.75 62.04,64.96 | v67.06,63.75 68.2,62.61 70.99,62.61 71.37,62.98 J21.3 71.37,66.8 75.95,71.37 J24.3
  Bottom 0.254: v70.87,81.53 75.95,81.53 80.39,77.09 80.39,72.01 81.03,71.37 J24.3 | v67.06,63.75 v63.25,63.75

## Text on the board
Bottom: v10 | v10 | v10 | v10 | v10 | v10
Milling: v-score | v-score | v-score | v-score | v-score | v-score | v-score